# EAGLE board ad060 (EAGLE 7.6.0), part 1 of 2
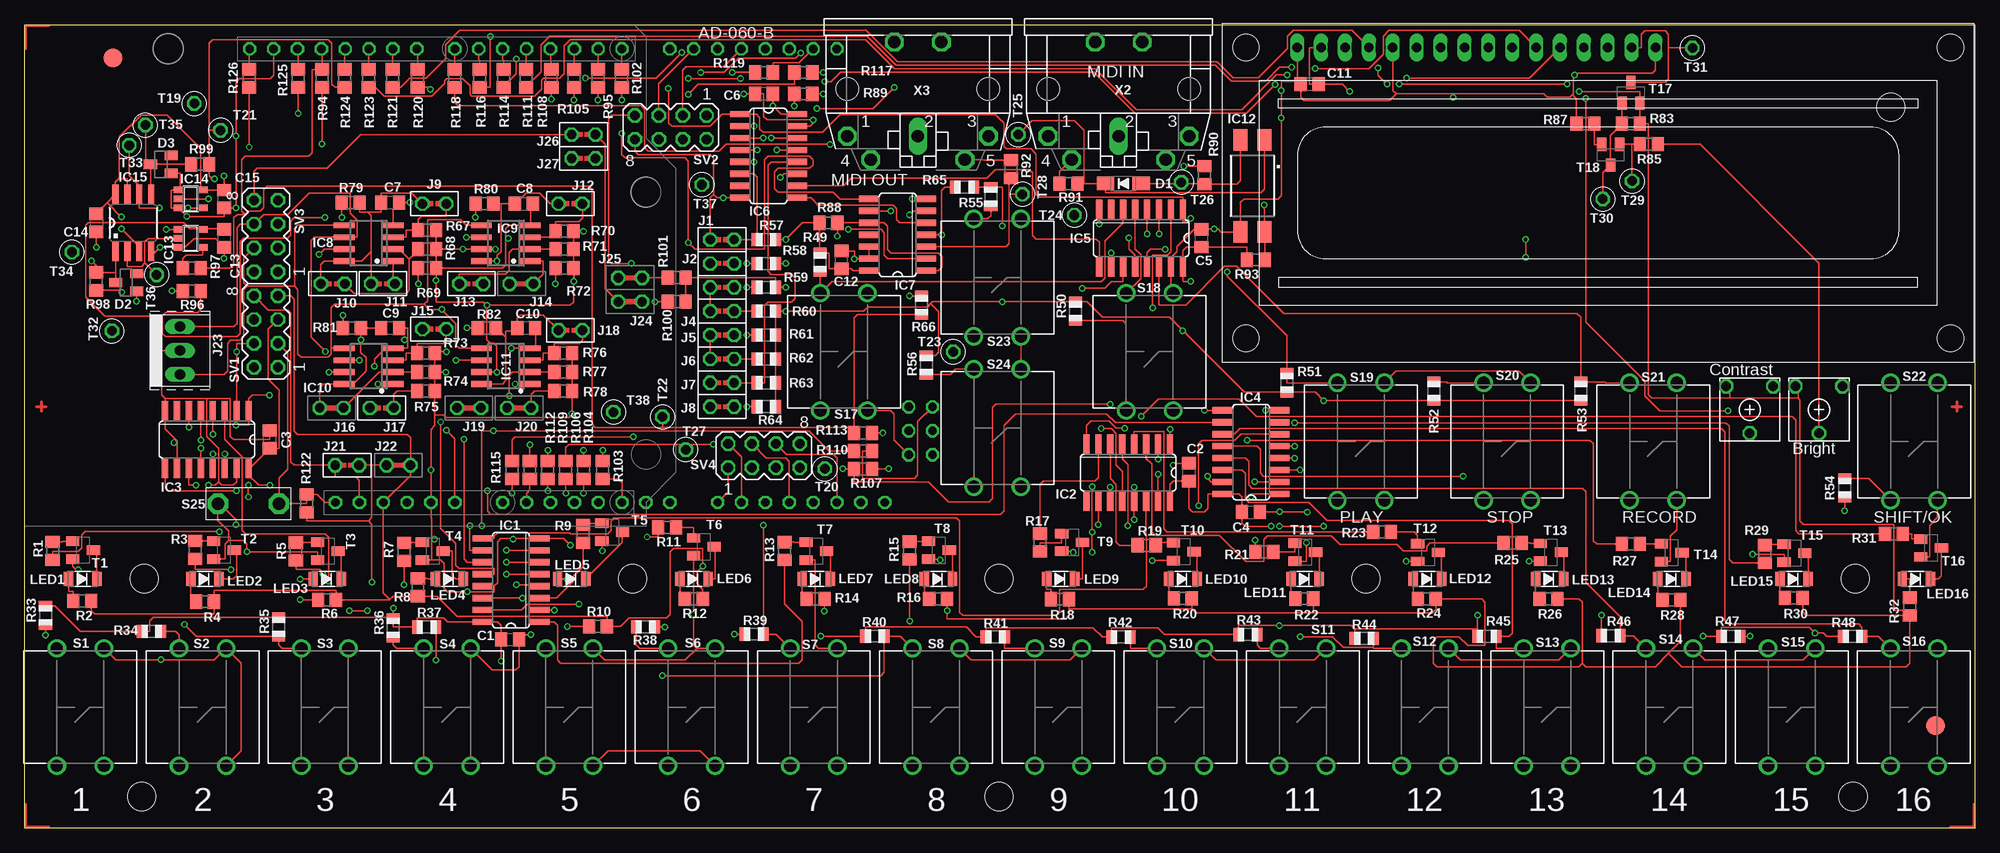
[diagram p0: board, top side]
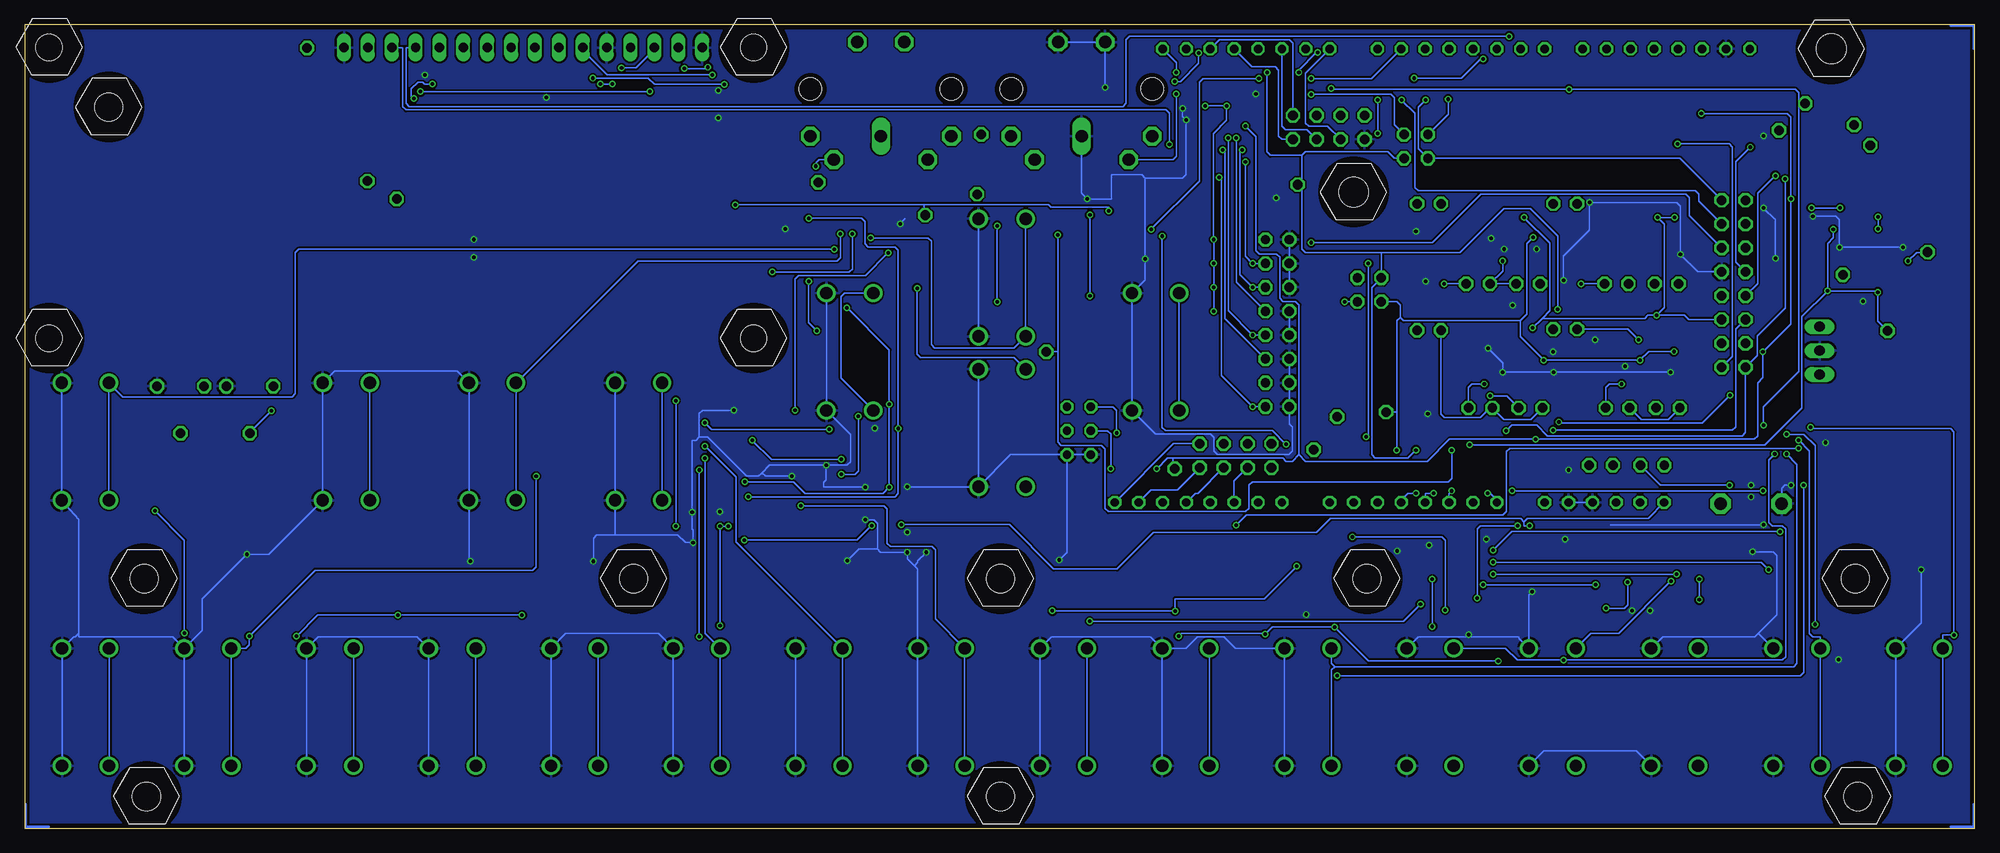
[diagram p1: board, bottom side, seen from below]

Size 207.39 x 85.47 mm. Coordinates in mm from the lower left corner, seen from the top.
Outline: 0,85.47 207.39,85.47 207.39,0 0,0 0,85.47
Copper layers (1*16): Top 0.137mm / dielectric 1.313mm / Bottom 0.137mm
Design rules "wusik *": minimum track width 7mil, minimum drill 15mil, track to track 7mil, track to pad 7mil, pad to pad 7mil, via to via 7mil, smd to smd 0mil, copper to edge 20mil, drill to drill 8mil, minimum pad ring 10mil, minimum via ring 6mil, stop-mask expansion 2mil, vias tented up to drill 0mil, thermal gap 10mil
Net classes: 0 default: width 0.178 mm, drill 0.381 mm, clearance 0.178 mm
Holes 3.17 mm at 15.27,82.91 66.07,67.67
bKeepout: area 62.8,56.7 to 67,63.4
tRestrict: area 43.1,66.2 to 44.1,66.7; area 58.9,73.5 to 59.9,74; area 58.9,71 to 60.1,71.5; area 57.5,66.2 to 58.5,66.7; area 46.9,57.7 to 48.1,58; area 32.1,57.7 to 33.4,58.2; area 37.6,57.8 to 38.6,58; area 43.1,52.8 to 44.2,53.3; area 37.5,44.5 to 38.6,45; area 32,44.6 to 33.1,45; area 52.2,57.8 to 53.3,58.2; area 57.5,52.7 to 58.7,53.1; 13 more areas

## Footprints (pad centres in the part's own frame; a part is rotated, then mirrored left to right if it is on the bottom)
C0805 = smd 1.3 x 1.5: 1 -0.95,0; 2 0.95,0
SOD-123 = smd 1.83 x 1.4: A 1.9,0; K -1.9,0
SOT-23 = smd 1 x 1.4: 1 -0.95,-1.1; 2 0.95,-1.1; 3 0,1.1
FIDUCIAL_2MMCIRCLE = smd 2 x 2: P$1 0,0
SO16 = smd 0.66 x 2.032: 1 -4.445,-3.073; 2 -3.175,-3.073; 3 -1.905,-3.073; 4 -0.635,-3.073; 5 0.635,-3.073; 6 1.905,-3.073; 7 3.175,-3.073; 8 4.445,-3.073; 9 4.445,3.073; 10 3.175,3.073; 11 1.905,3.073; 12 0.635,3.073; 13 -0.635,3.073; 14 -1.905,3.073; 15 -3.175,3.073; 16 -4.445,3.073
SO14 = smd 0.66 x 2.032: 1 -3.81,-3.073; 2 -2.54,-3.073; 3 -1.27,-3.073; 4 0,-3.073; 5 1.27,-3.073; 6 2.54,-3.073; 7 3.81,-3.073; 8 3.81,3.073; 9 2.54,3.073; 10 1.27,3.073; 11 0,3.073; 12 -1.27,3.073; 13 -2.54,3.073; 14 -3.81,3.073
SO-08 = smd 0.6 x 2.2: 1 -1.905,-2.6; 2 -0.635,-2.6; 3 0.635,-2.6; 4 1.905,-2.6; 5 1.905,2.6; 6 0.635,2.6; 7 -0.635,2.6; 8 -1.905,2.6
LITEON.SMD4 = smd 2.3 x 1.5: 1 -4.9,1.27; 2 -4.9,-1.27; 3 4.9,-1.27; 4 4.9,1.27
SOT23-5 = smd 0.69 x 0.99: 1 -0.95,-1.29; 2 0,-1.29; 3 0.95,-1.29; 4 0.95,1.3; 5 -0.95,1.3
SO08 = smd 0.66 x 2.032: 1 -1.905,-3.073; 2 -0.635,-3.073; 3 0.635,-3.073; 4 1.905,-3.073; 5 1.905,3.073; 6 0.635,3.073; 7 -0.635,3.073; 8 -1.905,3.073
JP2NO = drill 1 octagon: 1 -1.27,0; 2 1.27,0
JP2NC = drill 1 octagon: 1 -1.27,0; 2 1.27,0
GC22232031 = drill 1.067 long: 1 0,0; 2 2.54,0; 3 5.08,0
LED1206 = smd 1 x 1.5: A -1.5,0; K 1.5,0
SHIELD-NOTEXT-OCTAGONALPAD = drill 0.9 pad 1.27 octagon: 0_RX -25.4,27.94; 1_TX -25.4,25.4; 2 -25.4,22.86; 3 -25.4,20.32; 3V3 22.86,0; 4 -25.4,17.78; 5 -25.4,15.24; 5V 22.86,2.54; 6 -25.4,12.7; 7 -25.4,10.16; 8 -25.4,6.121; 9 -25.4,3.581; 10 -25.4,1.041; 11 -25.4,-1.499; 12 -25.4,-4.039; 13 -25.4,-6.579; A_0 22.86,15.24; A_1 22.86,17.78; A_2 22.86,20.32; A_3 22.86,22.86; A_4 22.86,25.4; A_5 22.86,27.94; AREF -25.4,-11.659; GND0 -25.4,-9.119; GND1 22.86,7.62; GND2 22.86,5.08; RESET 22.86,-2.54; VIN 22.86,10.16
MEGA-EXTRAPINS-SPIONLY = drill 0.9 octagon: 14 5.08,0; 15 7.62,0; 16 10.16,0; 17 12.7,0; 18 15.24,0; 19 17.78,0; 20 20.32,0; 21 22.86,0; 50 30.48,-38.1; 51 33.02,-38.1; 52 30.48,-40.64; 53 33.02,-40.64; A6 2.54,-48.26; A7 5.08,-48.26; A8 10.16,-48.26; A9 12.7,-48.26; A10 15.24,-48.26; A11 17.78,-48.26; A12 20.32,-48.26; A13 22.86,-48.26; A14 25.4,-48.26; A15 27.94,-48.26; GND@1 30.48,-43.18; GND@2 33.02,-43.18
R0805 = smd 1.3 x 1.5: 1 -0.95,0; 2 0.95,0
R0805' = smd 1.1 x 1.4: 1 -1,0; 2 1,0
EVND8A = drill 1 octagon: 1 -2.5,-2.5; 2 0,2.5; 3 2.5,-2.5
TL1100F160Q = drill 1.3: 1 -6.25,-2.5; 2 6.25,-2.5; 3 -6.25,2.5; 4 6.25,2.5
EVQPJ = drill 1.3 pad 2.184 octagon: A 0,0; B 6.5,0
MA04-2 = drill 1.016 octagon: 1 -3.81,-1.27; 2 -3.81,1.27; 3 -1.27,-1.27; 4 -1.27,1.27; 5 1.27,-1.27; 6 1.27,1.27; 7 3.81,-1.27; 8 3.81,1.27
SOT23-BEC = smd 1 x 1.4: B -0.95,-1.1; C 0,1.1; E 0.95,-1.1
TP40MIL = drill 1.016 octagon: 1 0,0
4-40SCREWHEXNUT = hole 2.997: 0,0
LCD1602 = drill 1 long: 1 8,33.46; 2 10.54,33.46; 3 13.08,33.46; 4 15.62,33.46; 5 18.16,33.46; 6 20.7,33.46; 7 23.24,33.46; 8 25.78,33.46; 9 28.32,33.46; 10 30.86,33.46; 11 33.4,33.46; 12 35.94,33.46; 13 38.48,33.46; 14 41.02,33.46; 15 43.56,33.46; 16 46.1,33.46 | hole 2.8: 2.54,2.54; 2.54,33.46; 77.46,33.46; 77.46,2.54
SDS-50J = drill 1.321 octagon: 1 7.5,5; 3 -7.5,5; 4 5,7.5; 5 -5,7.5; PE -2.5,-5; PE@ 2.5,-5 | drill 1.321 long: 2 0,5 | hole 2.4: 7.5,0; -7.5,0

## Placement (x,y rotation side)
C1  0.1uF  [C0805]  51.62,20.08 0 top
C2  0.1uF  [C0805]  123.83,37.86 90 top
C3  0.1uF  [C0805]  26.06,41.36 90 top
C4  0.1uF  [C0805]  130.41,33.63 0 top
C5  0.1uF  [C0805]  125.16,62.75 90 top
C6  0.1uF  [C0805]  78.61,78.11 180 top
C7  0.1uF  [C0805]  38.86,66.55 0 top
C8  0.1uF  [C0805]  53.09,66.42 0 top
C9  0.1uF  [C0805]  38.86,53.21 0 top
C10  0.1uF  [C0805]  53.34,53.21 0 top
C11  0.1uF  [C0805]  136.65,79.12 180 top
C12  0.1uF  [C0805]  86.87,60.45 90 top
C13  0.1uF  [C0805]  21.21,62.74 270 top
C14  0.1uF  [C0805]  7.62,64.39 270 top
C15  0.1uF  [C0805]  21.21,66.93 270 top
D1  [SOD-123]  116.84,68.58 0 top
D2  3.3V  [SOT-23]  10.79,58.04 90 top
D3  3.3V  [SOT-23]  14.48,70.61 90 top
FM1  FIDUCIAL2MMCIRCLE  [FIDUCIAL_2MMCIRCLE]  203.2,10.92 0 top
FM2  FIDUCIAL2MMCIRCLE  [FIDUCIAL_2MMCIRCLE]  9.4,81.92 0 top
FM3  [CROSSHAIR_12MIL]  1.78,44.83 0 top
FM4  [CROSSHAIR_12MIL]  205.49,44.83 0 top
IC1  74HC595D  [SO16]  51.71,26.38 90 top
IC2  74HC595D  [SO16]  117.36,37.81 180 top
IC3  74HC165D  [SO16]  19.37,41.34 180 top
IC4  74HC165D  [SO16]  130.43,40.01 90 top
IC5  74HC165D  [SO16]  118.73,62.75 180 top
IC6  74HC165D  [SO16]  79.1,71.5 270 top
IC7  74HC125D  [SO14]  92.84,63.12 90 top
IC8  M24256-BWMN6P  [SO-08]  36.58,62.23 90 top
IC9  M24256-BWMN6P  [SO-08]  51.18,62.23 90 top
IC10  M24256-BWMN6P  [SO-08]  36.58,49.15 90 top
IC11  M24256-BWMN6P  [SO-08]  51.18,49.15 90 top
IC12  LTV-817S  [LITEON.SMD4]  130.56,68.33 270 top
IC13  74VHC1GT125D  [SOT23-5]  17.65,62.74 270 top
IC14  74VHC1GT125D  [SOT23-5]  17.65,66.93 270 top
IC15  SST25VF040B  [SO08]  11.56,64.39 0 top
J1  JP2NO  [JP2NO]  74.17,62.61 0 top
J2  JP2NO  [JP2NO]  74.17,60.07 0 top
J3  JP2NO  [JP2NO]  74.17,57.53 0 top
J4  JP2NO  [JP2NO]  74.17,54.99 0 top
J5  JP2NO  [JP2NO]  74.17,52.45 0 top
J6  JP2NO  [JP2NO]  74.17,49.91 0 top
J7  JP2NO  [JP2NO]  74.17,47.37 0 top
J8  JP2NO  [JP2NO]  74.17,44.83 0 top
J9  JP2NO  [JP2NO]  43.56,66.42 180 top
J10  JP2NO  [JP2NO]  32.77,57.91 180 top
J11  JP2NO  [JP2NO]  38.1,57.91 180 top
J12  JP2NO  [JP2NO]  58.04,66.42 180 top
J13  JP2NO  [JP2NO]  47.5,57.91 0 top
J14  JP2NC  [JP2NC]  52.83,57.91 180 top
J15  JP2NO  [JP2NO]  43.56,53.09 180 top
J16  JP2NC  [JP2NC]  32.64,44.7 180 top
J17  JP2NO  [JP2NO]  37.97,44.7 180 top
J18  JP2NO  [JP2NO]  58.04,52.96 180 top
J19  JP2NC  [JP2NC]  47.24,44.7 180 top
J20  JP2NC  [JP2NC]  52.58,44.7 180 top
J21  JP2NO  [JP2NO]  34.29,38.61 0 top
J22  JP2NC  [JP2NC]  39.75,38.61 0 top
J23  CON3P1R.GC22232031  [GC22232031]  16.51,48.26 90 top
J24  JP2NC  [JP2NC]  64.39,56.01 0 top
J25  JP2NC  [JP2NC]  64.39,58.55 0 top
J26  JP2NO  [JP2NO]  59.44,73.79 0 top
J27  JP2NO  [JP2NO]  59.44,71.25 0 top
LED1  Red  [LED1206]  6.17,26.49 0 top
LED2  Red  [LED1206]  19.17,26.49 0 top
LED3  Red  [LED1206]  32.17,26.49 0 top
LED4  Red  [LED1206]  45.17,26.49 0 top
LED5  Red  [LED1206]  58.17,26.49 0 top
LED6  Red  [LED1206]  71.17,26.49 0 top
LED7  Red  [LED1206]  84.17,26.49 0 top
LED8  Red  [LED1206]  97.17,26.49 0 top
LED9  Red  [LED1206]  110.17,26.49 0 top
LED10  Red  [LED1206]  123.17,26.49 0 top
LED11  Red  [LED1206]  136.17,26.49 0 top
LED12  Red  [LED1206]  149.17,26.49 0 top
LED13  Red  [LED1206]  162.17,26.49 0 top
LED14  Red  [LED1206]  175.17,26.49 0 top
LED15  Red  [LED1206]  188.17,26.49 0 top
LED16  Red  [LED1206]  201.17,26.49 0 top
M1  Arduino UNO  [SHIELD-NOTEXT-OCTAGONALPAD]  35.59,57.51 270 top
M2  [MEGA-EXTRAPINS-SPIONLY]  63.53,82.91 0 top
R1  10k  [R0805]  2.96,29.49 270 top
R2  300  [R0805]  6.12,24.18 0 top
R3  10k  [R0805]  18.15,29.59 270 top
R4  300  [R0805]  19.19,24.09 0 top
R5  10k  [R0805]  28.85,29.42 270 top
R6  300  [R0805]  32.16,24.29 0 top
R7  10k  [R0805]  40.34,29.38 270 top
R8  300  [R0805]  41.81,25.62 270 top
R9  10k  [R0805]  59.39,31.29 270 top
R10  300  [R0805]  60.96,21.46 0 top
R11  10k  [R0805]  68.31,31.99 180 top
R12  300  [R0805]  71.16,24.4 0 top
R13  10k  [R0805]  80.81,29.48 270 top
R14  300  [R0805]  84.1,24.37 0 top
R15  10k  [R0805]  94.12,29.53 270 top
R16  300  [R0805]  97.14,24.4 0 top
R17  10k  [R0805]  107.97,30.38 90 top
R18  300  [R0805]  110.1,24.36 0 top
R19  10k  [R0805]  119.33,30.09 180 top
R20  300  [R0805]  123.16,24.44 0 top
R21  10k  [R0805]  131.83,29.36 180 top
R22  300  [R0805]  136.09,24.41 0 top
R23  10k  [R0805]  144.35,31.49 180 top
R24  300  [R0805]  149.11,24.36 0 top
R25  10k  [R0805]  158.24,30.34 180 top
R26  300  [R0805]  162.05,24.39 0 top
R27  10k  [R0805]  170.81,30.22 180 top
R28  300  [R0805]  175.14,24.26 0 top
R29  10k  [R0805]  185.04,29.15 270 top
R30  300  [R0805]  188.13,24.49 0 top
R31  10k  [R0805]  198.79,31.31 180 top
R32  300  [R0805]  200.47,23.57 270 top
R33  10k  [R0805']  2.22,22.62 90 top
R34  10k  [R0805']  13.49,20.92 180 top
R35  10k  [R0805']  27,21.42 90 top
R36  10k  [R0805']  39.2,21.32 90 top
R37  10k  [R0805']  42.74,21.39 180 top
R38  10k  [R0805']  66.02,21.4 0 top
R39  10k  [R0805']  77.56,20.64 180 top
R40  10k  [R0805']  90.41,20.42 180 top
R41  10k  [R0805']  103.22,20.36 180 top
R42  10k  [R0805']  116.58,20.32 180 top
R43  10k  [R0805']  130.09,20.59 180 top
R44  10k  [R0805']  142.46,20.17 180 top
R45  10k  [R0805']  155.5,20.39 180 top
R46  10k  [R0805']  168.69,20.47 180 top
R47  10k  [R0805']  181.44,20.41 180 top
R48  10k  [R0805']  194.39,20.41 180 top
R49  10k  [R0805']  84.58,60.2 90 top
R50  10k  [R0805']  111.76,54.99 90 top
R51  10k  [R0805']  134.24,47.37 270 top
R52  10k  [R0805']  149.86,46.48 270 top
R53  10k  [R0805']  165.48,46.48 270 top
R54  10k  [R0805']  193.55,36.2 270 top
R55  10k  [R0805']  102.74,67.18 90 top
R56  10k  [R0805']  95.89,49.28 90 top
R57  10k  [R0805']  78.87,62.61 0 top
R58  10k  [R0805']  78.87,60.07 0 top
R59  10k  [R0805']  78.87,57.53 0 top
R60  10k  [R0805']  78.87,54.99 0 top
R61  10k  [R0805']  78.87,52.45 0 top
R62  10k  [R0805']  78.87,49.91 0 top
R63  10k  [R0805']  78.87,47.37 0 top
R64  10k  [R0805']  78.87,44.83 0 top
R65  10k  [R0805']  99.95,68.2 0 top
R66  1k  [R0805']  95.38,55.63 90 top
R67  10k  [R0805]  42.8,63.63 180 top
R68  10k  [R0805]  42.8,61.59 180 top
R69  10k  [R0805]  42.8,59.56 180 top
R70  10k  [R0805]  57.4,63.5 180 top
R71  10k  [R0805]  57.4,61.59 180 top
R72  10k  [R0805]  57.4,59.56 180 top
R73  10k  [R0805]  42.67,50.55 180 top
R74  10k  [R0805]  42.67,48.51 180 top
R75  10k  [R0805]  42.67,46.48 180 top
R76  10k  [R0805]  57.28,50.55 180 top
R77  10k  [R0805]  57.28,48.51 180 top
R78  10k  [R0805]  57.28,46.48 180 top
R79  10  [R0805]  34.67,66.55 0 top
R80  10  [R0805]  48.9,66.42 0 top
R81  10  [R0805]  34.8,53.21 0 top
R82  10  [R0805]  49.15,53.21 0 top
R83  10k  [R0805]  170.81,74.93 0 top
R84  10k  [EVND8A]  183.45,44.51 180 top
R85  10k  [R0805]  172.72,72.77 180 top
R86  10k  [EVND8A]  190.82,44.51 180 top
R87  4.7k  [R0805]  165.99,74.93 0 top
R88  10k  [R0805]  85.47,64.39 180 top
R89  120  [R0805]  82.8,78.11 180 top
R90  120  [R0805]  125.48,69.47 90 top
R91  120  [R0805]  111,68.58 0 top
R92  120  [R0805]  104.9,70.1 90 top
R93  300  [R0805]  130.94,60.45 180 top
R94  1k  [R0805]  31.62,79.76 90 top
R95  1k  [R0805]  60.96,79.76 90 top
R96  10k  [R0805]  17.78,57.15 0 top
R97  1k  [R0805]  17.78,59.56 180 top
R98  1k  [R0805]  7.62,58.17 90 top
R99  1k  [R0805]  18.67,70.61 180 top
R100  1.5k  [R0805]  69.34,56.01 0 top
R101  1.5k  [R0805]  69.34,58.55 0 top
R102  100  [R0805]  63.5,79.76 90 top
R103  100  [R0805]  61.47,38.1 90 top
R104  100  [R0805]  59.44,38.1 90 top
R105  100  [R0805]  58.42,79.76 90 top
R106  100  [R0805]  57.53,38.1 90 top
R107  100  [R0805]  89.15,38.23 0 top
R108  100  [R0805]  56.01,79.76 90 top
R109  100  [R0805]  55.63,38.1 90 top
R110  100  [R0805]  89.15,40.13 0 top
R111  100  [R0805]  53.34,79.76 90 top
R112  100  [R0805]  53.72,38.1 90 top
R113  100  [R0805]  89.15,42.04 0 top
R114  100  [R0805]  50.93,79.76 90 top
R115  100  [R0805]  51.82,38.1 90 top
R116  100  [R0805]  48.39,79.76 90 top
R117  100  [R0805]  82.8,80.39 0 top
R118  100  [R0805]  45.72,79.76 90 top
R119  100  [R0805]  78.61,80.39 0 top
R120  100  [R0805]  41.78,79.76 90 top
R121  100  [R0805]  39.12,79.76 90 top
R122  10k  [R0805]  29.97,34.54 270 top
R123  100  [R0805]  36.58,79.76 90 top
R124  100  [R0805]  34.04,79.76 90 top
R125  100  [R0805]  29.08,79.76 90 top
R126  100  [R0805]  23.88,79.76 90 top
S1  [TL1100F160Q]  5.92,12.87 90 top
S2  [TL1100F160Q]  18.92,12.87 90 top
S3  [TL1100F160Q]  31.92,12.87 90 top
S4  [TL1100F160Q]  44.92,12.87 90 top
S5  [TL1100F160Q]  57.92,12.87 90 top
S6  [TL1100F160Q]  70.92,12.87 90 top
S7  [TL1100F160Q]  83.92,12.87 90 top
S8  [TL1100F160Q]  96.92,12.87 90 top
S9  [TL1100F160Q]  109.92,12.87 90 top
S10  [TL1100F160Q]  122.92,12.87 90 top
S11  [TL1100F160Q]  135.92,12.87 90 top
S12  [TL1100F160Q]  148.92,12.87 90 top
S13  [TL1100F160Q]  161.92,12.87 90 top
S14  [TL1100F160Q]  174.92,12.87 90 top
S15  [TL1100F160Q]  187.92,12.87 90 top
S16  [TL1100F160Q]  200.92,12.87 90 top
S17  [TL1100F160Q]  87.12,50.67 90 top
S18  [TL1100F160Q]  119.63,50.67 90 top
S19  [TL1100F160Q]  142.11,41.12 90 top
S20  [TL1100F160Q]  157.65,41.12 90 top
S21  [TL1100F160Q]  173.19,41.12 90 top
S22  [TL1100F160Q]  200.94,41.12 90 top
S23  [TL1100F160Q]  103.44,58.57 90 top
S24  [TL1100F160Q]  103.44,42.57 90 top
S25  [EVQPJ]  20.55,34.51 0 top
SV1  [MA04-2]  25.65,52.83 90 top
SV2  [MA04-2]  68.71,74.55 180 top
SV3  [MA04-2]  25.65,62.99 90 top
SV4  [MA04-2]  78.61,39.62 0 top
T1  NPN  [SOT23-BEC]  6.21,29.56 270 top
T2  NPN  [SOT23-BEC]  21.2,29.58 270 top
T3  NPN  [SOT23-BEC]  32.25,29.46 270 top
T4  NPN  [SOT23-BEC]  43.4,29.46 270 top
T5  NPN  [SOT23-BEC]  62.48,31.48 270 top
T6  NPN  [SOT23-BEC]  72.23,29.92 270 top
T7  NPN  [SOT23-BEC]  84.18,29.46 270 top
T8  NPN  [SOT23-BEC]  97.23,29.55 270 top
T9  NPN  [SOT23-BEC]  111.39,30.39 270 top
T10  NPN  [SOT23-BEC]  123.28,29.42 270 top
T11  NPN  [SOT23-BEC]  136.19,29.35 270 top
T12  NPN  [SOT23-BEC]  149.24,29.32 270 top
T13  NPN  [SOT23-BEC]  162.31,29.34 270 top
T14  NPN  [SOT23-BEC]  175.16,29.3 270 top
T15  NPN  [SOT23-BEC]  188.21,29.25 270 top
T16  NPN  [SOT23-BEC]  202.75,29.8 270 top
T17  PNP  [SOT23-BEC]  170.81,78.23 0 top
T18  NPN  [SOT23-BEC]  168.66,71.63 180 top
T19  [TP40MIL]  18.03,77.09 0 top
T20  [TP40MIL]  85.09,38.23 0 top
T21  [TP40MIL]  20.83,74.23 0 top
T22  [TP40MIL]  67.82,43.75 270 top
T23  [TP40MIL]  98.74,50.67 270 top
T24  [TP40MIL]  111.63,65.21 270 top
T25  [TP40MIL]  105.66,73.79 270 top
T26  [TP40MIL]  123,68.71 270 top
T27  [TP40MIL]  70.29,40.26 270 top
T28  [TP40MIL]  106.11,67.44 270 top
T29  [TP40MIL]  170.94,68.83 270 top
T30  [TP40MIL]  167.83,66.93 270 top
T31  [TP40MIL]  177.36,82.99 270 top
T32  [TP40MIL]  9.27,52.9 270 top
T33  [TP40MIL]  11.11,72.64 270 top
T34  [TP40MIL]  5.02,61.28 270 top
T35  [TP40MIL]  12.83,74.8 270 top
T36  [TP40MIL]  14.03,58.86 270 top
T37  [TP40MIL]  72.01,68.45 270 top
T38  [TP40MIL]  62.61,44.26 270 top
U$1  [CORNER-BL-NOARROW]  0,85.47 270 top
U$2  [4-40SCREWHEXNUT]  198.44,76.71 0 top
U$3  [CORNER-BL-NOARROW]  0,0 0 top
U$4  [CORNER-BL-NOARROW]  207.39,0 90 top
U$5  [PB-MARK-0.2]  64.5,35.46 0 top
U$6  [4-40SCREWHEXNUT]  103.63,3.37 0 top
U$7  [4-40SCREWHEXNUT]  12.7,26.54 0 top
U$8  [4-40SCREWHEXNUT]  64.64,26.54 0 top
U$9  [ROHS-MARK-0.2]  184.99,36.06 0 top
U$10  [4-40SCREWHEXNUT]  103.63,26.54 0 top
U$11  [4-40SCREWHEXNUT]  194.69,26.54 0 top
U$12  [4-40SCREWHEXNUT]  142.62,26.54 0 top
U$13  [4-40SCREWHEXNUT']  15.27,82.91 0 top
U$14  [4-40SCREWHEXNUT']  66.07,67.67 0 top
U$15  [4-40SCREWHEXNUT']  129.86,83.06 0 top
U$16  [4-40SCREWHEXNUT']  129.86,52.13 0 top
U$17  [4-40SCREWHEXNUT']  204.79,52.13 0 top
U$18  [4-40SCREWHEXNUT']  204.79,83.06 0 top
U$19  [4-40SCREWHEXNUT]  12.45,3.37 0 top
U$20  [4-40SCREWHEXNUT]  194.44,3.37 0 top
X1  16x2  [LCD1602]  127.34,49.58 0 top
X2  SDS-50J  [SDS-50J]  116.33,78.61 180 top
X3  SDS-50J  [SDS-50J]  95,78.61 180 top

## Library data of the parts
C1-C15 R1-R32 R67-R83 R85 R87-R126 = rcl
D1 LED1-LED16 = Magnum
D2 D3 IC12 IC15 J23 T19-T38 U$1-U$4 U$6-U$8 U$10-U$12 U$19 U$20 = ads4
FM1-FM4 = pickplace
IC1-IC7 = 74xx-eu
IC8-IC11 = microchip; MF: MICROCHIP; MPN: 24LC256-I/SN; OC_FARNELL: 9757996; OC_NEWARK: 27C9144
IC13 IC14 = 74xx-little-us
J1-J22 J24-J27 = JUMPERS
M1 M2 = Arduino-Various
R33-R66 X1 = adafruit
R84 R86 = Panasonic.Pots
S1-S24 = ESwitch
S25 = ADS
SV1-SV4 = con-lstb; OC_FARNELL: unknown; OC_NEWARK: unknown
T1-T18 = transistor
U$5 U$9 = rohs
U$13-U$18 = 4_40ScrewHexNut
X2 X3 = CUI

## Nets
!RESET: IC1.10 IC2.10 M1.RESET R122.1 S25.B SV1.3
+3V3: C14.1 C15.1 IC14.5 IC15.3 IC15.7 IC15.8 J21.1 M1.3V3 SV1.8
+5V: C11.1 J22.2 M1.5V R2.2 R4.2 R6.2 R8.2 R10.2 R12.2 R14.2 R16.2 R18.2 R20.2 R22.2 R24.2 R26.2 R28.2 R30.2 R32.2 R83.2 R84.3 R86.3 SV1.7 T17.E X1.2
AREF: R126.1 SV3.2
D2: J27.1 R105.1 SV3.7
D3: J26.1 R108.1 SV3.8
D14: R115.2 SV2.7
FLASH_!SS: IC13.1 R96.1 R98.1 R112.2 T32.1
GND: C1.2 C2.2 C3.2 C4.2 C5.2 C6.2 C7.2 C8.2 C9.2 C10.2 C11.2 C12.2 C13.2 C14.2 C15.2 D2.1 D3.1 IC1.8 IC1.13 IC2.8 IC2.13 IC3.8 IC3.10 IC3.15 IC4.8 IC4.15 IC5.8 IC5.15 IC6.8 IC6.15 IC7.7 IC7.12 IC7.13 IC8.4 IC8.7 IC9.4 IC9.7 IC10.4 IC10.7 IC11.4 IC11.7 IC12.3 IC13.3 IC14.1 IC14.3 IC15.4 J1.1 J2.1 J3.1 J4.1 J5.1 J6.1 J7.1 J8.1 J23.2 M1.GND0 M1.GND1 M1.GND2 M2.GND@1 M2.GND@2 R67.1 R68.1 R69.1 R70.1 R71.1 R72.1 R73.1 R74.1 R75.1 R76.1 R77.1 R78.1 R84.1 R86.1 R87.1 S1.1 S1.2 S2.1 S2.2 S3.1 S3.2 S4.1 S4.2 S5.1 S5.2 S6.1 S6.2 S7.1 S7.2 S8.1 S8.2 S9.1 S9.2 S10.1 S10.2 S11.1 S11.2 S12.1 S12.2 S13.1 S13.2 S14.1 S14.2 S15.1 S15.2 S16.1 S16.2 S17.1 S17.2 S18.1 S18.2 S19.1 S19.2 S20.1 S20.2 S21.1 S21.2 S22.1 S22.2 S23.1 S23.2 S24.1 S24.2 S25.A SV2.8 SV3.1 T1.E T2.E T3.E T4.E T5.E T6.E T7.E T8.E T9.E T10.E T11.E T12.E T13.E T14.E T15.E T16.E X1.1 X1.5 X1.16 X3.2 X3.PE X3.PE@
LATCHOUT: IC1.12 IC2.12 IC3.1 IC4.1 IC5.1 IC6.1 R120.1 T19.1
LCD_D4: R111.1 X1.11
LCD_D5: R114.1 X1.12
LCD_D6: R116.1 X1.13
LCD_D7: R118.1 X1.14
LCD_E: R123.1 X1.6
LCD_RS: R121.1 X1.4
MIDI_EN: IC7.1 IC7.10 R88.1 R106.2 T27.1
N$1: IC1.9 IC2.14
N$2: M2.50 R113.2
N$3: LED1.A R2.1
N$4: LED1.K T1.C
N$5: LED2.A R4.1
N$6: LED2.K T2.C
N$7: IC1.7 R1.2
N$8: IC1.6 R3.2
N$9: R3.1 T2.B
N$10: IC13.4 R97.2
N$11: M1.11 R124.2
N$12: R1.1 T1.B
N$13: M1.13 R125.2
N$14: LED3.A R6.1
N$15: M2.51 R110.2
N$16: IC3.9 IC4.10
N$17: IC5.9 IC6.10
N$18: M1.4 R111.2
N$19: M1.6 R116.2
N$20: IC5.6 R49.1 S17.3 S17.4
N$21: M1.5 R114.2
N$22: IC3.6 R33.1 S1.3 S1.4
N$23: M1.7 R118.2
N$24: IC3.5 R34.1 S2.3 S2.4
N$25: M1.8 R120.2
N$26: IC3.4 R35.1 S3.3 S3.4
N$27: M1.A_1 R112.1
N$28: IC3.3 R36.1 S4.3 S4.4
N$29: M1.A_0 R115.1
N$30: IC3.14 R37.1 S5.3 S5.4
N$31: LED3.K T3.C
N$32: R5.1 T3.B
N$33: IC3.13 R38.1 S6.3 S6.4
N$34: IC3.12 R39.1 S7.3 S7.4
N$35: IC4.6 R41.1 S9.3 S9.4
N$36: IC4.5 R42.1 S10.3 S10.4
N$37: IC8.1 J11.1 R69.2
N$38: LED4.A R8.1
N$39: LED4.K T4.C
N$40: R7.1 T4.B
N$41: IC8.2 J10.1 R68.2
N$42: IC8.3 J9.1 R67.2
N$43: IC4.4 R43.1 S11.3 S11.4
N$44: IC3.11 R40.1 S8.3 S8.4
N$45: IC4.3 R44.1 S12.3 S12.4
N$46: IC4.14 R45.1 S13.3 S13.4
N$47: IC4.13 R46.1 S14.3 S14.4
N$48: IC4.12 R47.1 S15.3 S15.4
N$49: IC4.11 R48.1 S16.3 S16.4
N$50: IC5.5 R50.1 S18.3 S18.4
N$51: IC5.4 R51.1 S19.3 S19.4
N$52: IC5.3 R52.1 S20.3 S20.4
N$53: IC5.14 R53.1 S21.3 S21.4
N$54: IC5.13 R54.1 S22.3 S22.4
N$55: LED5.A R10.1
N$56: LED5.K T5.C
N$57: R9.1 T5.B
N$58: LED6.A R12.1
N$59: LED6.K T6.C
N$60: R11.1 T6.B
N$61: LED7.A R14.1
N$62: LED7.K T7.C
N$63: R13.1 T7.B
N$64: LED8.A R16.1
N$65: LED8.K T8.C
N$66: R15.1 T8.B
N$67: LED9.A R18.1
N$68: LED9.K T9.C
N$69: LED10.A R20.1
N$70: LED10.K T10.C
N$71: R17.1 T9.B
N$72: R19.1 T10.B
N$73: LED11.A R22.1
N$74: LED11.K T11.C
N$75: R21.1 T11.B
N$76: LED12.A R24.1
N$77: LED12.K T12.C
N$78: R23.1 T12.B
N$79: LED13.A R26.1
N$80: LED13.K T13.C
N$81: R25.1 T13.B
N$82: LED14.A R28.1
N$83: LED14.K T14.C
N$84: R27.1 T14.B
N$85: LED15.A R30.1
N$86: LED15.K T15.C
N$87: R29.1 T15.B
N$88: LED16.A R32.1
N$89: LED16.K T16.C
N$90: R31.1 T16.B
N$91: IC1.5 R5.2
N$92: IC1.4 R7.2
N$93: IC1.3 R9.2
N$94: IC1.2 R11.2
N$95: IC1.1 R13.2
N$96: IC1.15 R15.2
N$97: IC2.7 R17.2
N$98: IC2.6 R19.2
N$99: IC2.5 R21.2
N$100: IC2.4 R23.2
N$101: IC2.3 R25.2
N$102: IC2.2 R27.2
N$103: IC2.1 R29.2
N$104: IC2.15 R31.2
N$105: IC5.12 R55.1 S23.3 S23.4
N$106: IC5.11 R56.1 S24.3 S24.4
N$107: IC6.6 J1.2 R57.1
N$108: IC6.5 J2.2 R58.1
N$109: IC6.4 J3.2 R59.1
N$110: IC6.3 J4.2 R60.1
N$111: IC6.14 J5.2 R61.1
N$112: IC6.13 J6.2 R62.1
N$113: IC6.12 J7.2 R63.1
N$114: IC6.11 J8.2 R64.1
N$115: R84.2 X1.3
N$116: R89.1 X3.4
N$117: T17.C T31.1 X1.15
N$118: IC9.1 J14.1 R72.2
N$119: IC9.2 J13.1 R71.2
N$120: IC9.3 J12.1 R70.2
N$121: IC10.1 J17.1 R75.2
N$122: IC10.2 J16.1 R74.2
N$123: IC10.3 J15.1 R73.2
N$124: IC11.1 J20.1 R78.2
N$125: IC11.2 J19.1 R77.2
N$126: IC11.3 J18.1 R76.2
N$127: R83.1 T17.B T18.C T30.1
N$128: R92.2 X3.5
N$129: R87.2 T18.E
N$130: R85.1 R86.2
N$131: R85.2 T18.B T29.1
N$132: M1.0_RX R102.2
N$133: M1.A_3 R106.1
N$134: M1.A_2 R109.1
N$135: R91.1 X2.4
N$136: R90.2 X2.5
N$137: D1.K IC12.1 R91.2 T25.1
N$138: D1.A IC12.2 R90.1 T26.1
N$139: M1.9 R121.2
N$140: M1.10 R123.2
N$141: J24.2 R100.1
N$142: J25.2 R101.1
N$143: M2.21 R117.2
N$144: M1.AREF R126.2
N$145: M2.20 R119.2
N$146: M1.A_4 R104.1
N$147: M1.A_5 R103.1
N$148: M1.2 R105.2
N$149: M1.3 R108.2
N$150: M2.52 R107.2
N$151: R95.1 SV3.5
N$152: IC14.4 IC15.6 T33.1
N$153: IC7.3 R92.1 T28.1
N$154: IC13.2 IC15.2 T36.1
N$155: IC7.9 IC12.4 R93.1 T24.1
N$156: R94.1 SV1.1
N$158: IC7.6 R66.2
N$159: IC6.9 IC7.5
N$162: D3.3 IC15.5 R99.2 T35.1
N$163: D2.3 IC15.1 R98.2 T34.1
PD2: M2.19 SV2.1
PD3: M2.18 SV2.2
PH0: M2.17 SV2.3
PH1: M2.16 SV2.4
PJ0: M2.15 SV2.5
PJ1: M2.14 SV2.6
PK0: M2.A8 SV4.1
PK1: M2.A9 SV4.2
PK2: M2.A10 SV4.3
PK3: M2.A11 SV4.4
PK4: M2.A12 SV4.5
PK5: M2.A13 SV4.6
PK6: M2.A14 SV4.7
PK7: M2.A15 SV4.8
SCL: IC8.6 IC9.6 IC10.6 IC11.6 J23.3 J24.1 J26.2 R103.2 R117.1 SV3.6 T38.1
SDA: IC8.5 IC9.5 IC10.5 IC11.5 J23.1 J25.1 J27.2 R104.2 R119.1 SV3.4 T37.1
SHIFTMIDDLE: IC4.9 IC5.10
SPI_CLK: IC1.11 IC2.11 IC3.2 IC4.2 IC5.2 IC6.2 IC14.2 R107.1 R125.1 SV1.4 T20.1
SPI_MISO: M1.12 R66.1 R94.2 R97.1 R113.1 T22.1
SPI_MOSI: IC1.14 R99.1 R110.1 R124.1 SV1.2 T21.1
SWITCH_!SS: IC7.4 R65.1 R109.2 T23.1
UART_RX: IC7.8 R102.1 SV3.3
UART_TX: IC7.2 M1.1_TX R95.2
V+: C1.1 C2.1 C3.1 C4.1 C5.1 C6.1 C12.1 C13.1 IC1.16 IC2.16 IC3.16 IC4.16 IC5.16 IC6.16 IC7.14 IC13.5 J21.2 J22.1 R33.2 R34.2 R35.2 R36.2 R37.2 R38.2 R39.2 R40.2 R41.2 R42.2 R43.2 R44.2 R45.2 R46.2 R47.2 R48.2 R49.2 R50.2 R51.2 R52.2 R53.2 R54.2 R55.2 R56.2 R57.2 R58.2 R59.2 R60.2 R61.2 R62.2 R63.2 R64.2 R65.2 R79.1 R80.1 R81.1 R82.1 R88.2 R89.2 R93.2 R96.2 R100.2 R101.2 R122.2 SV1.5
V+_E1: C7.1 IC8.8 J9.2 J10.2 J11.2 R79.2
V+_E2: C8.1 IC9.8 J12.2 J13.2 J14.2 R80.2
V+_E3: C9.1 IC10.8 J15.2 J16.2 J17.2 R81.2
V+_E4: C10.1 IC11.8 J18.2 J19.2 J20.2 R82.2
VIN: M1.VIN SV1.6